# Altium PCB 核心板.PcbDoc (part 1 of 2)
Units mm, origin at the board's own origin, x right, y up, seen from the top; angles counter-clockwise.
Board outline 30 x 30 mm, 4 copper layers (Top Layer, Mid-Layer 1, Internal Plane 2, Bottom Layer); 39 components, 95 nets, 264 pads, 53 vias.
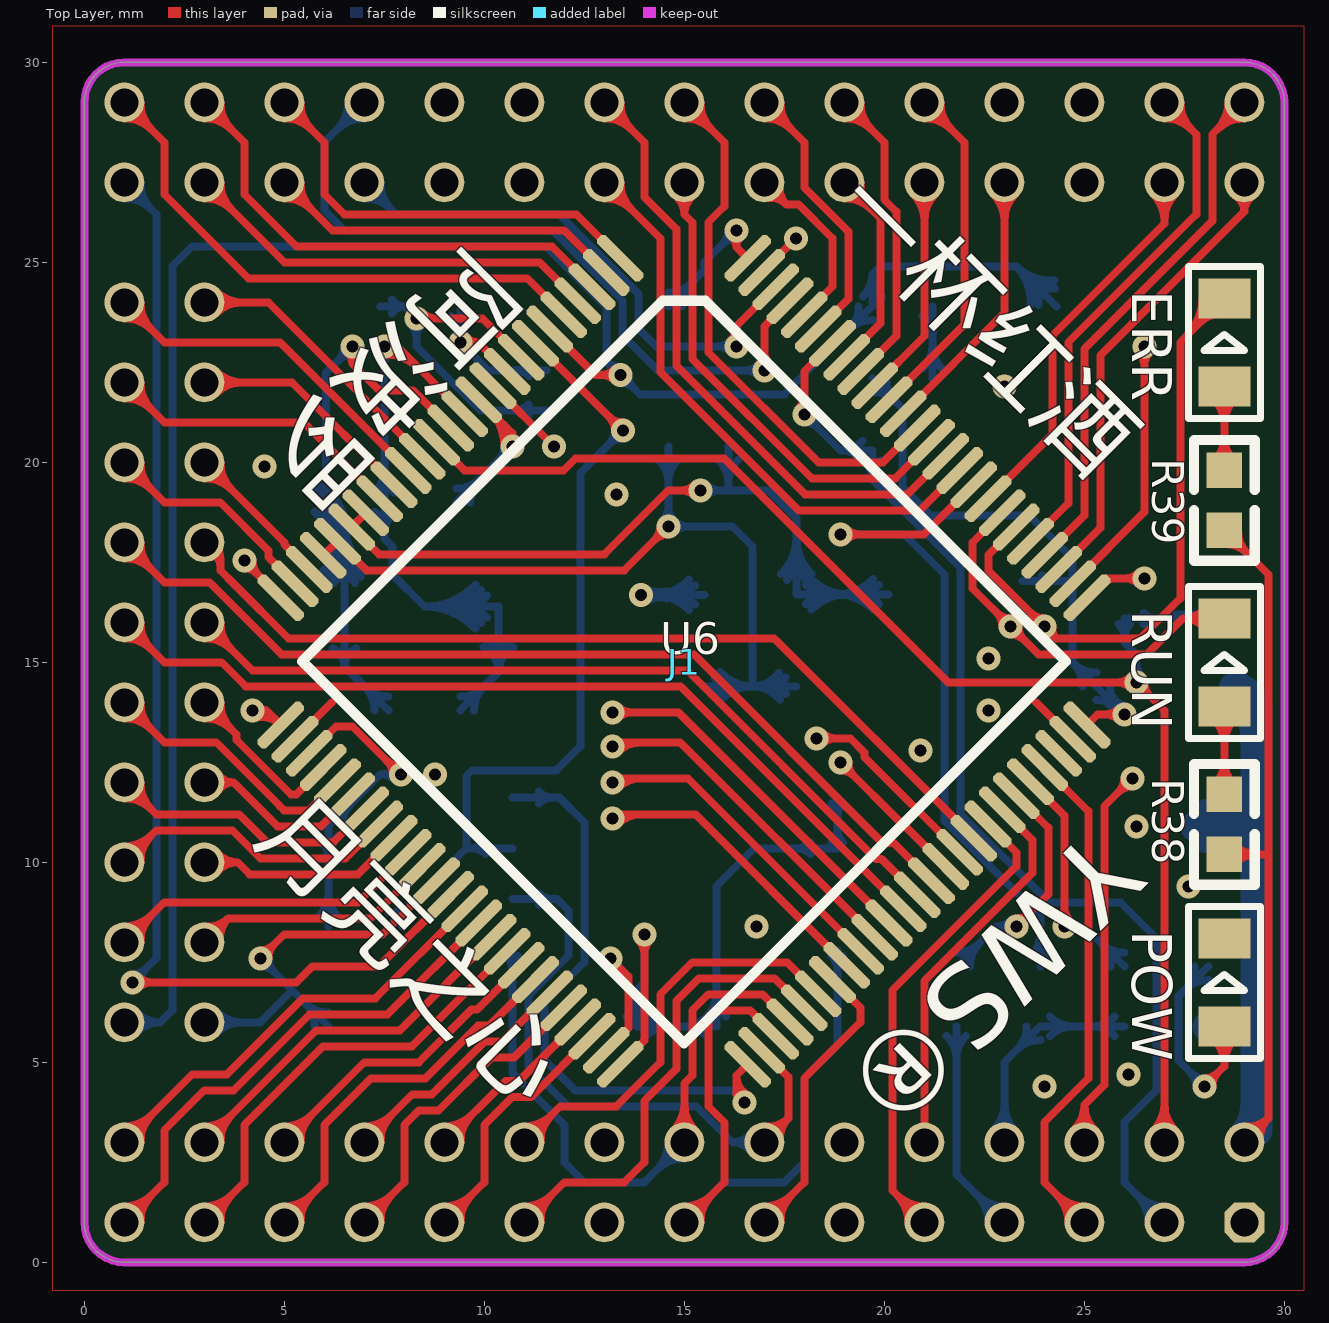
[diagram p0: Top Layer view]
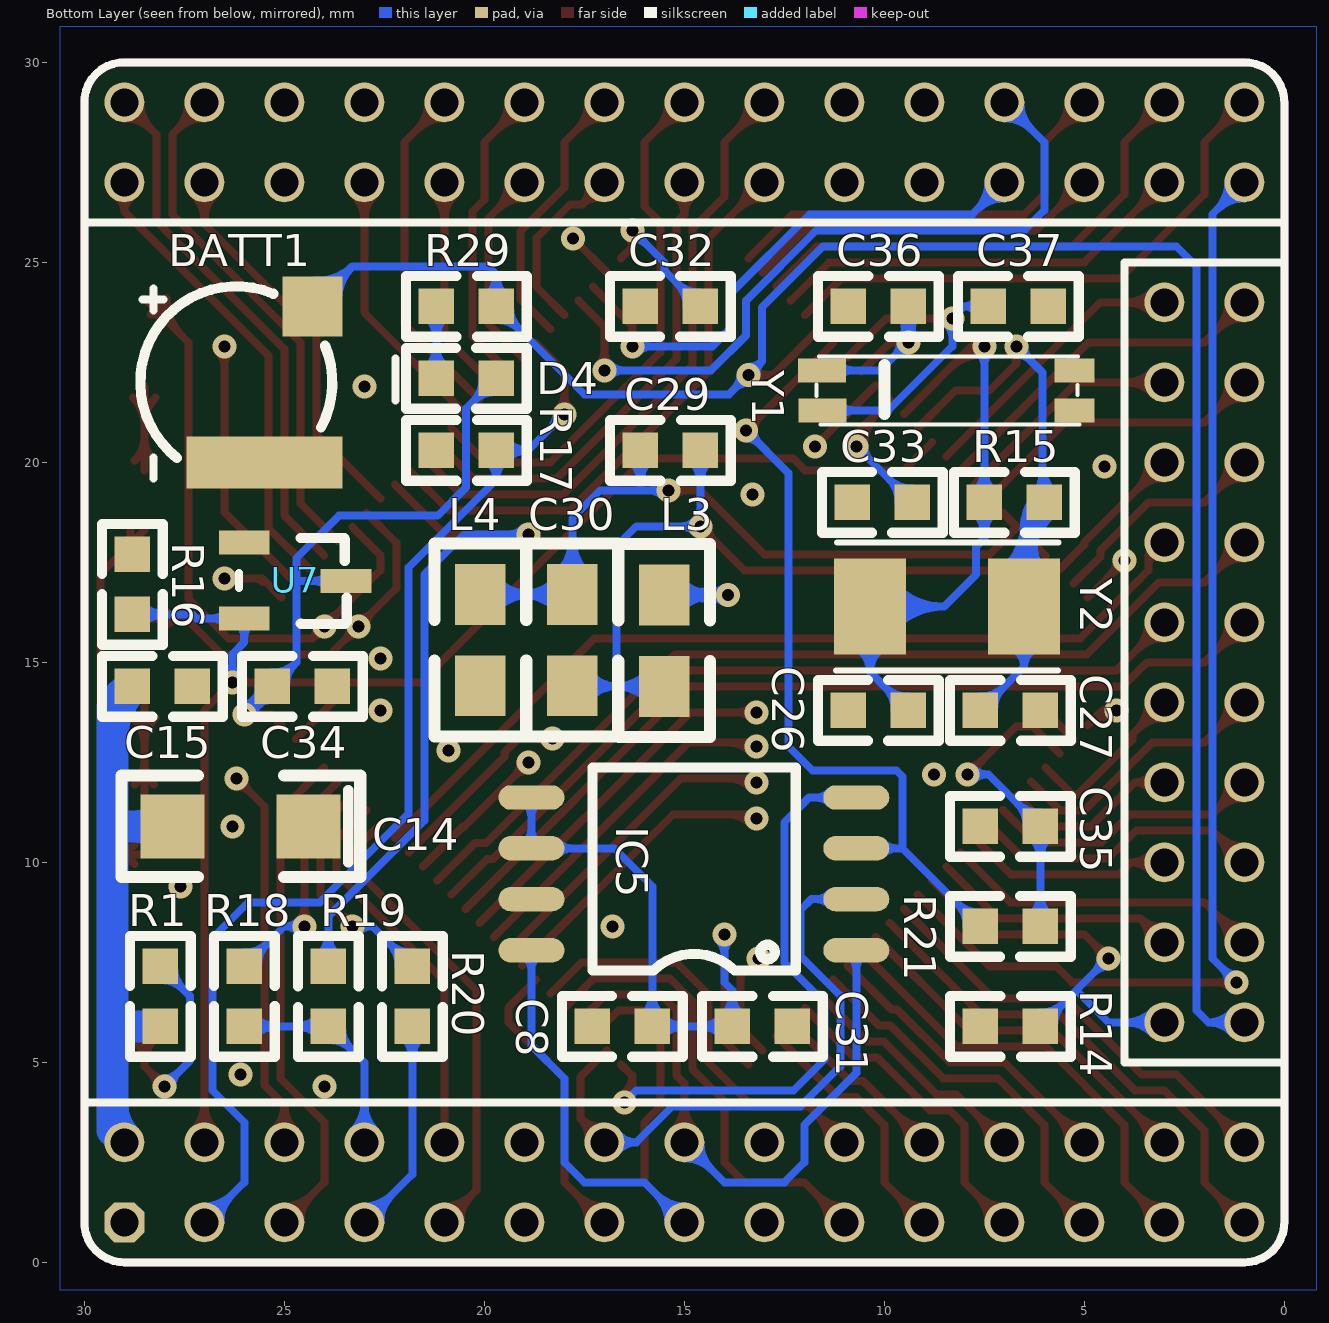
[diagram p1: Bottom Layer view, seen from below]
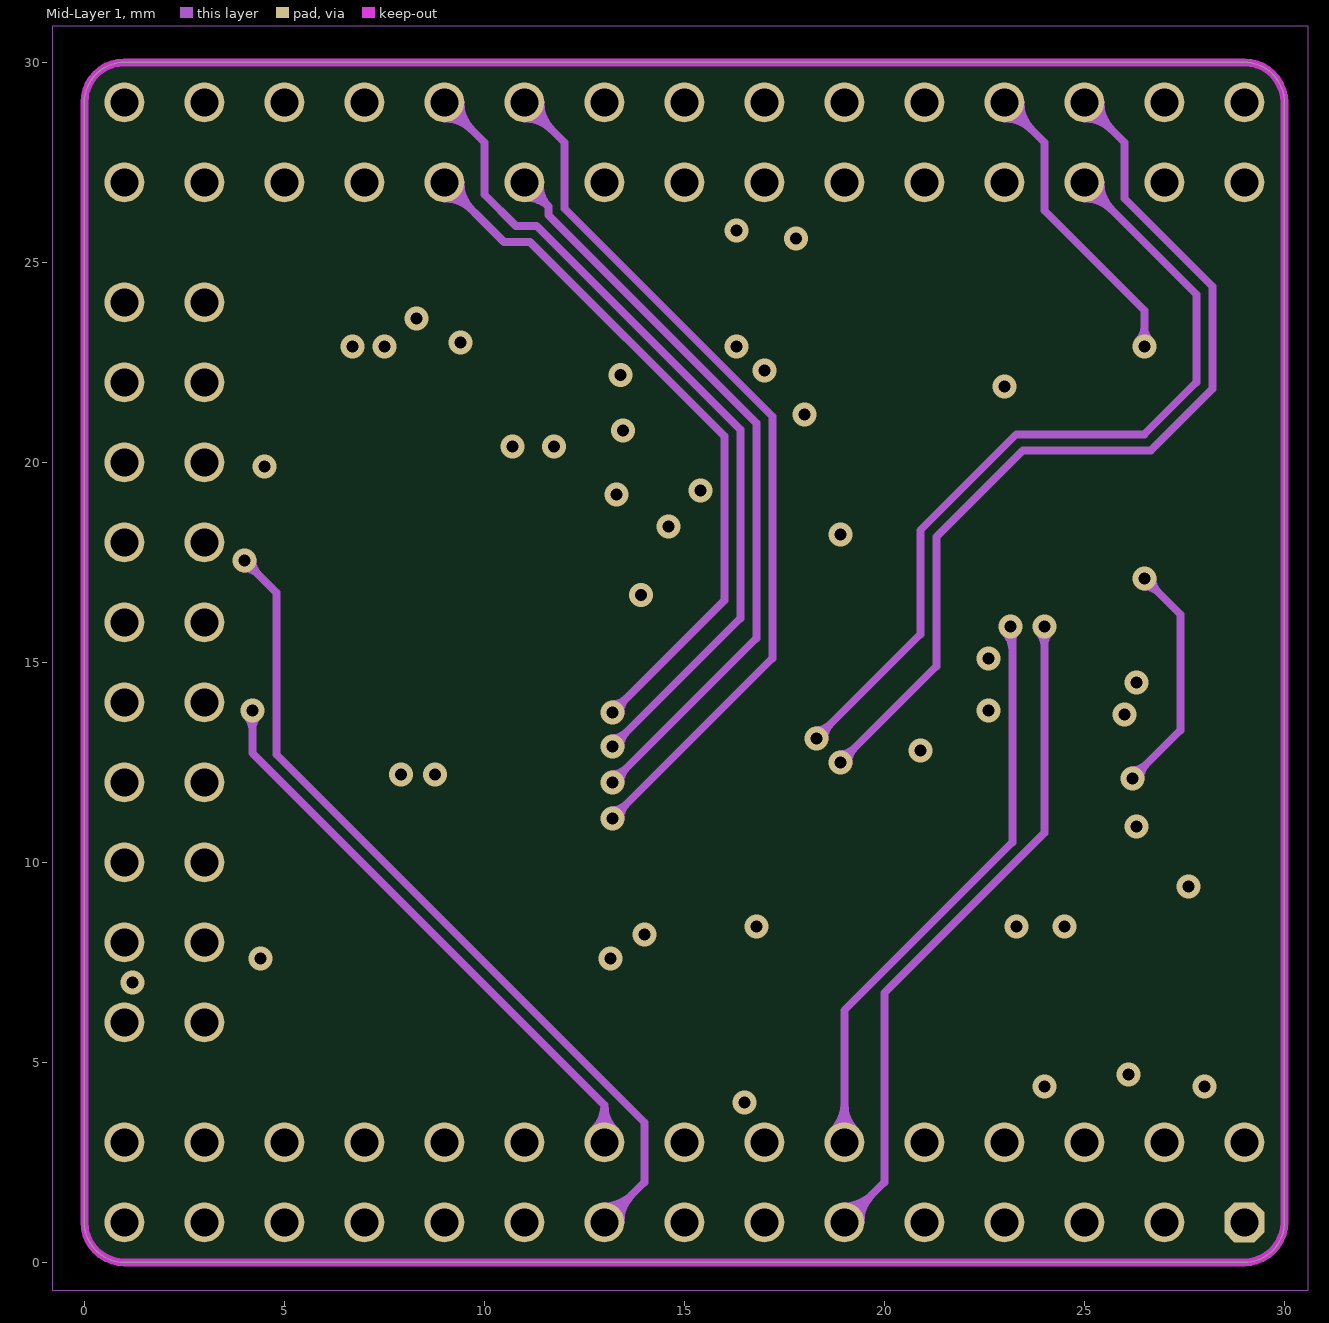
[diagram p2: Mid-Layer 1]
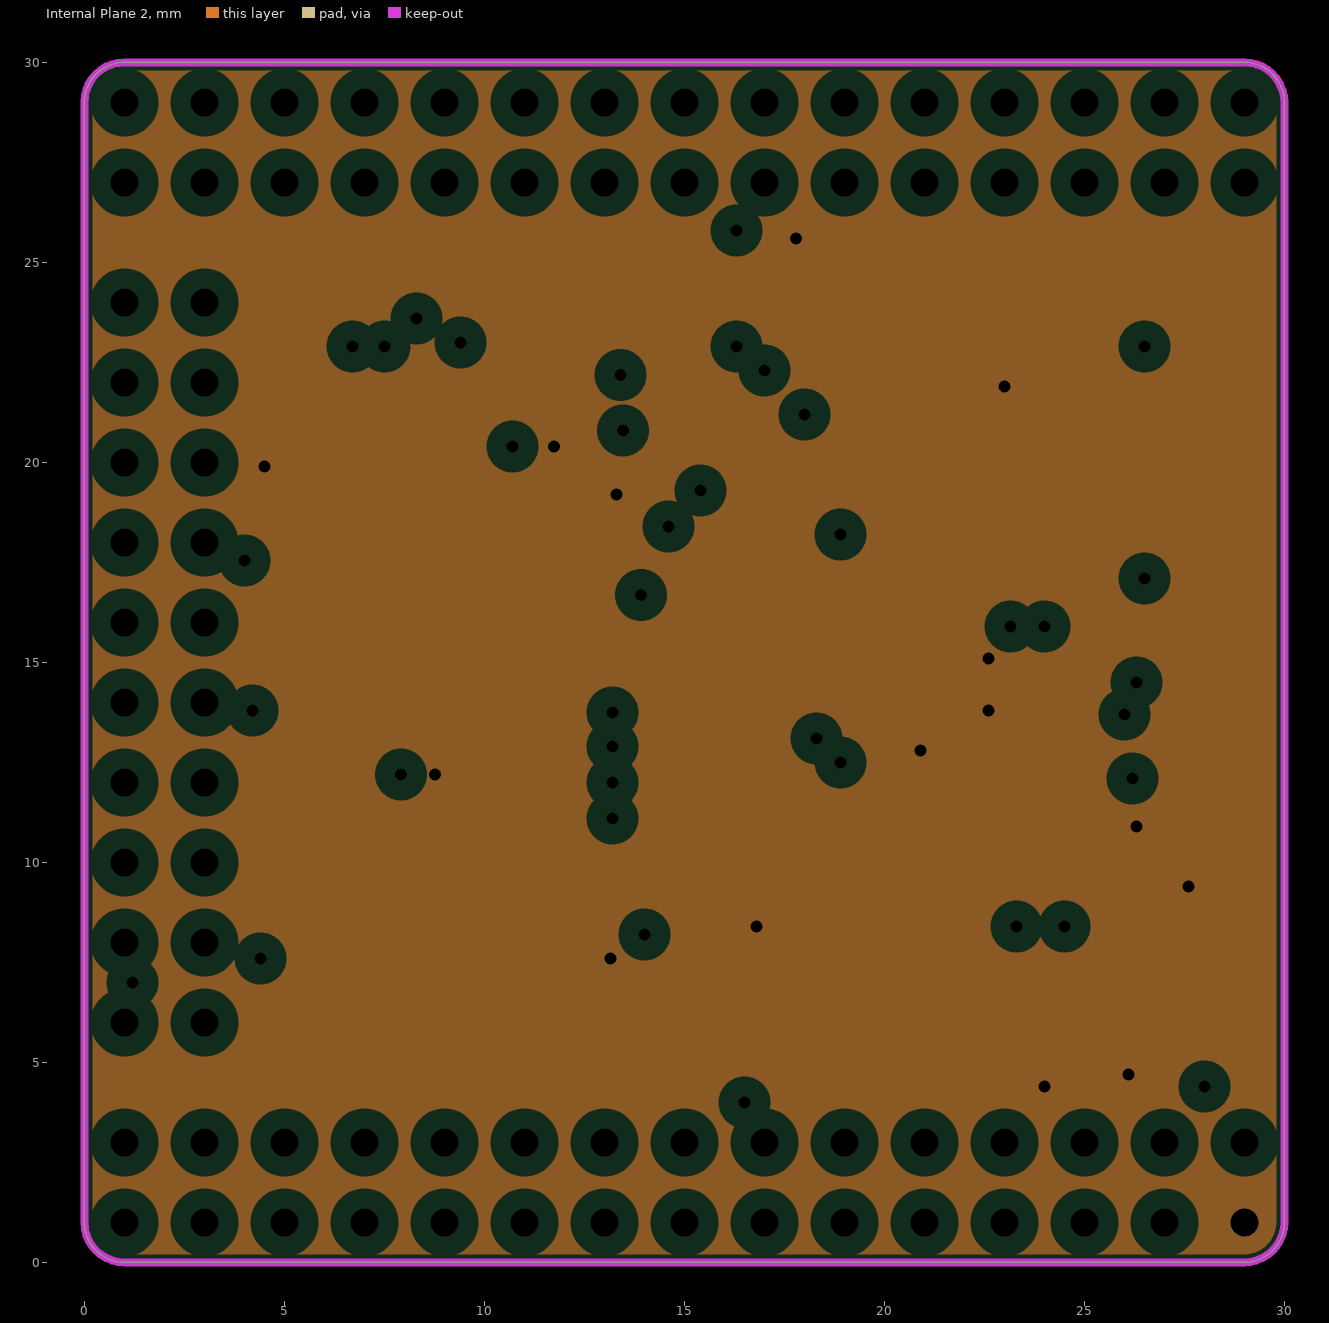
[diagram p3: Internal Plane 2, clearances drawn from the general rule]

## Layer stack, top to bottom
Top Layer: signal copper 0.0356
Dielectric: core 0.32, FR-4, Dk 4.8
Mid-Layer 1: signal copper 0.0356
Dielectric: prepreg 0.32, FR-4, Dk 4.8
Internal Plane 2: plane copper 0.0356, net GND
Dielectric: core 0.32, FR-4, Dk 4.8
Bottom Layer: signal copper 0.0356

## Board outline
0,1 ccw(c1,1) 1,0 29,0 ccw(c29,1) 30,1 30,29 ccw(c29,29) 29,30 1,30 ccw(c1,29) 0,29

## Design rules (kind name [scope] priority, off if disabled: settings)
AssemblyTestPointUsage [All] p0: scope1count=1 scope1_0_kind=Board scope1_0_value=Board scope2count=1 scope2_0_kind=Board scope2_0_value=Board commentlength=0
AssemblyTestpoint [All] p0: scope1count=1 scope1_0_kind=Board scope1_0_value=Board scope2count=1 scope2_0_kind=Board scope2_0_value=Board commentlength=0
Clearance 敷铜与焊盘的间距 [All] p0 off: scope1count=1 scope1_0_kind=Board scope1_0_value=Board scope2count=1 scope2_0_kind=Board scope2_0_value=Board commentlength=79 gap=0.3 // Protel DXP Scope 2 Expression Was: InPolygon   敷铜与焊盘的间距应不小于0.254mm，这里默认为0.3mm。
Clearance 整体布线间距 [All] p0: scope1count=1 scope1_0_kind=Board scope1_0_value=Board scope2count=1 scope2_0_kind=Board scope2_0_value=Board commentlength=21 gap=0.2 // 这个针对整体布线间距用，默认为0.2MM
Clearance 敷铜与焊盘的间距 [(InPadClass('All Pads')) vs InPolygon] p1: gap=0.3 // 敷铜与焊盘的间距应不小于0.254mm，这里默认为0.3mm。
Clearance 整体布线间距 [All] p2: gap=0.2 // 这个针对整体布线间距用，默认为0.2MM
ComponentClearance 器件间距 [All] p0 off: scope1count=1 scope1_0_kind=Board scope1_0_value=Board scope2count=1 scope2_0_kind=Board scope2_0_value=Board commentlength=0 gap=0.254 collisioncheckmode=3
ComponentClearance 器件间距 [All] p1 off: gap=0.254 collisioncheckmode=3 verticalgap=0.254 showdistances=FALSE
DiffPairsRouting [All] p0: scope1count=1 scope1_0_kind=Board scope1_0_value=Board scope2count=1 scope2_0_kind=Board scope2_0_value=Board commentlength=0
FabricationTestPointUsage [All] p0: scope1count=1 scope1_0_kind=Board scope1_0_value=Board scope2count=1 scope2_0_kind=Board scope2_0_value=Board commentlength=0 valid=0 allowmultiple=FALSE
FabricationTestpoint [All] p0: scope1count=1 scope1_0_kind=Board scope1_0_value=Board scope2count=1 scope2_0_kind=Board scope2_0_value=Board commentlength=0 side=3 testpointundercomponent=TRUE minsize=1.016 maxsize=2.54 preferedsize=1.524 minholesize=0 maxholesize=1.016 preferedholesize=0.813 testpointgrid=0.025
FanoutControl Fanout_BGA [All] p0 off: scope1count=1 scope1_0_kind=Board scope1_0_value=Board scope2count=1 scope2_0_kind=Board scope2_0_value=Board commentlength=69 // Protel DXP Scope 1 Expression Was: IsBGA   Fanout_BGA (Default Rule)
FanoutControl Fanout_LCC [All] p0 off: scope1count=1 scope1_0_kind=Board scope1_0_value=Board scope2count=1 scope2_0_kind=Board scope2_0_value=Board commentlength=69 // Protel DXP Scope 1 Expression Was: IsLCC   Fanout_LCC (Default Rule)
FanoutControl Fanout_SOIC [All] p0 off: scope1count=1 scope1_0_kind=Board scope1_0_value=Board scope2count=1 scope2_0_kind=Board scope2_0_value=Board commentlength=71 // Protel DXP Scope 1 Expression Was: IsSOIC   Fanout_SOIC (Default Rule)
FanoutControl Fanout_Small [All] p0 off: scope1count=1 scope1_0_kind=Board scope1_0_value=Board scope2count=1 scope2_0_kind=Board scope2_0_value=Board commentlength=84 // Protel DXP Scope 1 Expression Was: (CompPinCount < 5)   Fanout_Small (Default Rule)
FanoutControl Fanout_Default [All] p0: scope1count=1 scope1_0_kind=Board scope1_0_value=Board scope2count=1 scope2_0_kind=Board scope2_0_value=Board commentlength=30 // Fanout_Default (Default Rule)
Height [All] p0 off: scope1count=1 scope1_0_kind=Board scope1_0_value=Board scope2count=1 scope2_0_kind=Board scope2_0_value=Board commentlength=0
Height [All] p1 off: minheight=0 maxheight=25.4 prefheight=12.7
HoleSize [All] p0: scope1count=1 scope1_0_kind=Board scope1_0_value=Board scope2count=1 scope2_0_kind=Board scope2_0_value=Board commentlength=0 absolutevalues=TRUE maxlimit=2.54 minlimit=0.025 maxpercent=80.000 minpercent=20.000
HoleToHoleClearance [All] p0: scope1count=1 scope1_0_kind=Board scope1_0_value=Board scope2count=1 scope2_0_kind=Board scope2_0_value=Board commentlength=0
LayerPairs [All] p0: scope1count=1 scope1_0_kind=Board scope1_0_value=Board scope2count=1 scope2_0_kind=Board scope2_0_value=Board commentlength=0 enforce=TRUE
MinimumSolderMaskSliver [All] p0: scope1count=1 scope1_0_kind=Board scope1_0_value=Board scope2count=1 scope2_0_kind=Board scope2_0_value=Board commentlength=0
NetAntennae [All] p0: scope1count=1 scope1_0_kind=Board scope1_0_value=Board scope2count=1 scope2_0_kind=Board scope2_0_value=Board commentlength=0
PasteMaskExpansion [All] p0: scope1count=1 scope1_0_kind=Board scope1_0_value=Board scope2count=1 scope2_0_kind=Board scope2_0_value=Board commentlength=0 expansion=0
PlaneClearance [All] p0: scope1count=1 scope1_0_kind=Board scope1_0_value=Board scope2count=1 scope2_0_kind=Board scope2_0_value=Board commentlength=0 clearance=0.5
PlaneClearance [All] p1: clearance=0.5
PlaneConnect [All] p0: scope1count=1 scope1_0_kind=Board scope1_0_value=Board scope2count=1 scope2_0_kind=Board scope2_0_value=Board commentlength=0 planeconnectstyle=Relief reliefexpansion=0.15 reliefentries=4 reliefconductorwidth=0.2 reliefairgap=0.3
PlaneConnect [All] p1: planeconnectstyle=Relief reliefexpansion=0.15 reliefentries=4 reliefconductorwidth=0.2 reliefairgap=0.3
PolygonConnect 过孔敷铜连接 [All] p0 off: scope1count=1 scope1_0_kind=Board scope1_0_value=Board scope2count=1 scope2_0_kind=Board scope2_0_value=Board commentlength=54 connectstyle=Direct reliefconductorwidth=0.254 reliefentries=4 polygonreliefangle="90 Angle" // Protel DXP Scope 2 Expression Was: IsVia   过孔敷铜连接为直连型
PolygonConnect 整版敷铜连接 [All] p0: scope1count=1 scope1_0_kind=Board scope1_0_value=Board scope2count=1 scope2_0_kind=Board scope2_0_value=Board commentlength=31 connectstyle=Relief reliefconductorwidth=0.2 reliefentries=4 polygonreliefangle="90 Angle" // 整版敷铜连接为散热型。导线宽度0.2mm；间距：0.3mm。
PolygonConnect 过孔敷铜连接 [All vs IsVia] p1: connectstyle=Direct reliefconductorwidth=0.254 reliefentries=4 polygonreliefangle="90 Angle" airgapwidth=0.254 // 过孔敷铜连接为直连型
PolygonConnect 整版敷铜连接 [All] p2: connectstyle=Relief reliefconductorwidth=0.2 reliefentries=4 polygonreliefangle="90 Angle" airgapwidth=0.3 // 整版敷铜连接为散热型。导线宽度0.2mm；间距：0.3mm。
RoomDefinition 核心板 [All] p0: scope1count=1 scope1_0_kind=ComponentClass scope1_0_value=核心板 scope2count=1 scope2_0_kind=Board scope2_0_value=Board commentlength=0 region_x1=440275590 region_y1=427440090 region_x2=454803149 region_y2=439960629 confinementstyle=ConfineIn
RoomDefinition 核心板 [InComponentClass('核心板')] p1: confinementstyle=ConfineIn formatcopy=TRUE lockcomponents=FALSE outline -6.1,-0.902 30.8,-0.902 30.8,30.9 -6.1,30.9
RoutingCorners [All] p0: scope1count=1 scope1_0_kind=Board scope1_0_value=Board scope2count=1 scope2_0_kind=Board scope2_0_value=Board commentlength=0 cornerstyle=45-Degree minsetback=2.54 maxsetback=2.54
RoutingLayers [All] p0: scope1count=1 scope1_0_kind=Board scope1_0_value=Board scope2count=1 scope2_0_kind=Board scope2_0_value=Board commentlength=0 top layer=Automatic mid layer 1=Automatic bottom layer=Automatic
RoutingPriority [All] p0: scope1count=1 scope1_0_kind=Board scope1_0_value=Board scope2count=1 scope2_0_kind=Board scope2_0_value=Board commentlength=0
RoutingTopology [All] p0: scope1count=1 scope1_0_kind=Board scope1_0_value=Board scope2count=1 scope2_0_kind=Board scope2_0_value=Board commentlength=0 topology=Shortest
RoutingVias 过孔尺寸 [All] p0: scope1count=1 scope1_0_kind=Board scope1_0_value=Board scope2count=1 scope2_0_kind=Board scope2_0_value=Board commentlength=0 holewidth=0.3 width=0.6 viastyle="Through Hole" minholewidth=0.3 minwidth=0.6 maxholewidth=0.3 maxwidth=0.6
RoutingVias 过孔尺寸 [All] p1: holewidth=0.3 width=0.6 viastyle="Through Hole" minholewidth=0.3 minwidth=0.6 maxholewidth=0.3 maxwidth=0.6
ShortCircuit 短路允许 [All] p0: scope1count=1 scope1_0_kind=Board scope1_0_value=Board scope2count=1 scope2_0_kind=Board scope2_0_value=Board commentlength=10 allowed=FALSE // 默认为不允许短路。
ShortCircuit 短路允许 [All] p1: allowed=FALSE // 默认为不允许短路。
SilkToSilkClearance [All] p0: scope1count=1 scope1_0_kind=Board scope1_0_value=Board scope2count=1 scope2_0_kind=Board scope2_0_value=Board commentlength=0
SilkToSolderMaskClearance [All] p0 off: scope1count=1 scope1_0_kind=Board scope1_0_value=Board scope2count=1 scope2_0_kind=Board scope2_0_value=Board commentlength=44 // Protel DXP Scope 1 Expression Was: IsPad
SolderMaskExpansion [All] p0: scope1count=1 scope1_0_kind=Board scope1_0_value=Board scope2count=1 scope2_0_kind=Board scope2_0_value=Board commentlength=0 expansion=0.102
SolderMaskExpansion [All] p1: expansion=0.102
UnRoutedNet 开路约束 [All] p0: scope1count=1 scope1_0_kind=Board scope1_0_value=Board scope2count=1 scope2_0_kind=Board scope2_0_value=Board commentlength=0
UnRoutedNet 开路约束 [All] p1:
Width 整体线宽 [All] p0: scope1count=1 scope1_0_kind=Board scope1_0_value=Board scope2count=1 scope2_0_kind=Board scope2_0_value=Board commentlength=34 maxlimit=2 minlimit=0.2 preferedwidth=0.2 // 整体线宽默认为：最小：0.2mm；最大：2mm；默认：0.2mm。
Width 整体线宽 [All] p1: maxlimit=2 minlimit=0.2 preferedwidth=0.2 toplayer_maxwidth=0.2 midlayer1_maxwidth=0.2 minimp=50.000000 maximp=50.000000 favimp=50.000000 // 整体线宽默认为：最小：0.2mm；最大：2mm；默认：0.2mm。
22 further rules are at their usual default settings.

## Components (designator, comment, footprint, x,y, rotation, side; value= is the part's Value field where it differs from the comment)
BATT1 "XH414H" XH414H_IV01E 26.2,22 r270 bottom
C8 "104" 0603A 15.8,5.9 r0 bottom
C14 "470UF" 1206C 27.8,10.9 r180 bottom
C15 "104" 0603A 28.8,14.4 r180 bottom
C26 "15" 0603A 9.4,13.8 r0 bottom
C27 "15" 0603A 7.6,13.8 r180 bottom
C29 "104" 0603A 16.1,20.3 r180 bottom
C30 "1uF" 0805 17.8,16.7 r270 bottom
C31 "104" 0603A 13.8,5.9 r180 bottom
C32 "104" 0603A 14.6,23.9 r0 bottom
C33 "104" 0603A 9.3,19 r0 bottom
C34 "104" 0603A 25.3,14.4 r180 bottom
C35 "104" 0603A 6.1,10.9 r0 bottom
C36 "15" 0603A 10.9,23.9 r180 bottom
C37 "15" 0603A 5.9,23.9 r0 bottom
D4 "RB521S" 0603D 19.7,22.1 r0 bottom
ERR "" SMDLED 28.5,21.9 r90 top
IC5 "AT45DBX" SOIC-8 10.7,7.8 r0 bottom
J1 "物联网核心板" 核心板-物联网1 29,1 r0 top
L3 "100uH" 0805 15.5,14.4 r90 bottom
L4 "100uH" 0805 20.1,16.7 r270 bottom
POW "" SMDLED 28.5,5.9 r90 top
R1 "1K" 0603A 28.1,5.9 r90 bottom
R14 "10K" 0603A 7.6,5.9 r180 bottom
R15 "1M" 0603A 7.5,19 r180 bottom
R16 "10K" 0603A 28.8,16.2 r90 bottom
R17 "1K" 0603A 21.2,20.3 r180 bottom
R18 "10" 0603A 26,5.9 r90 bottom
R19 "1.5K" 0603A 23.9,7.4 r270 bottom
R20 "10" 0603A 21.8,7.4 r270 bottom
R21 "10K" 0603A 6.1,8.4 r0 bottom
R29 "1.5K" 0603A 21.2,23.9 r180 bottom
R38 "1K" 0603A 28.5,10.2 r90 top
R39 "1K" 0603A 28.5,18.3 r90 top
RUN "" SMDLED 28.5,13.9 r90 top
U6 "stm32f1xVxT" LQFP100 13.4,25.1 r315 top
U7 "MAX809" SOT23 26,18 r270 bottom
Y1 "32768" MC-146 8.4,21.8 r180 bottom
Y2 "8M" XTAL-5032 6.5,16.4 r0 bottom

## Footprints (in the part's own frame and the unit in brackets; to place one, negate y for a bottom-side part, rotate by r counter-clockwise, add the part's x,y. Pads: shape width x height; smd on the part's side, far side on the other; paste and mask are expansions set on the pad)
0603A [mm]
  rect 0.88x0.88 smd: 1(0,0) 2(1.5,0)
  silkscreen extent -0.76,-0.76 2.26,0.76
0603D [mm]
  rect 0.88x0.88 smd: A(0,0) K(1.5,0)
  silkscreen extent -0.76,-0.76 2.52,0.76
0805 [mil]
  rect 60x50 smd: 1(0,0) 2(90,0)
  silkscreen extent -50,-45 140,45
1206C [mm]
  rect 1.6x1.6 smd: 1(0,0) 2(3.4,0)
  silkscreen extent -1.27,-1.27 4.7,1.27
LQFP100 [mm]
  oct 1x1 on Top Overlay: 0(0.842,1.408)
  oct 1.5x0.3 smd: 1(0,0) 2(0,-0.5) 3(0,-1) 4(0,-1.5) 5(0,-2) 6(0,-2.5) 7(0,-3) 8(0,-3.5) 9(0,-4) 10(0,-4.5) 11(0,-5) 12(0,-5.5) 13(0,-6) 14(0,-6.5) 15(0,-7) 16(0,-7.5) 17(0,-8) 18(0,-8.5) 19(0,-9) 20(0,-9.5) 21(0,-10) 22(0,-10.5) 23(0,-11) 24(0,-11.5) 25(0,-12) 51(16.5,-12) 52(16.5,-11.5) 53(16.5,-11) 54(16.5,-10.5) 55(16.5,-10) 56(16.5,-9.5) 57(16.5,-9) 58(16.5,-8.5) 59(16.5,-8) 60(16.5,-7.5) 61(16.5,-7) 62(16.5,-6.5) 63(16.5,-6) 64(16.5,-5.5) 65(16.5,-5) 66(16.5,-4.5) 67(16.5,-4) 68(16.5,-3.5) 69(16.5,-3) 70(16.5,-2.5) 71(16.5,-2) 72(16.5,-1.5) 73(16.5,-1) 74(16.5,-0.5) 75(16.5,0)
  oct 0.3x1.5 smd: 26(2.25,-14.25) 27(2.75,-14.25) 28(3.25,-14.25) 29(3.75,-14.25) 30(4.25,-14.25) 31(4.75,-14.25) 32(5.25,-14.25) 33(5.75,-14.25) 34(6.25,-14.25) 35(6.75,-14.25) 36(7.25,-14.25) 37(7.75,-14.25) 38(8.25,-14.24) 39(8.75,-14.25) 40(9.25,-14.25) 41(9.75,-14.25) 42(10.25,-14.25) 43(10.75,-14.25) 44(11.25,-14.25) 45(11.75,-14.25) 46(12.25,-14.25) 47(12.75,-14.25) 48(13.25,-14.25) 49(13.75,-14.25) 50(14.25,-14.25) 76(14.25,2.25) 77(13.75,2.25) 78(13.25,2.25) 79(12.75,2.25) 80(12.25,2.25) 81(11.75,2.25) 82(11.25,2.25) 83(10.75,2.25) 84(10.25,2.25) 85(9.75,2.25) 86(9.25,2.25) 87(8.75,2.25) 88(8.25,2.25) 89(7.75,2.25) 90(7.25,2.25) 91(6.75,2.25) 92(6.25,2.25) 93(5.75,2.25) 94(5.25,2.25) 95(4.75,2.25) 96(4.25,2.25) 97(3.75,2.25) 98(3.25,2.25) 99(2.75,2.25) 100(2.25,2.25)
  silkscreen extent 1.5,-12.75 15,0.75
MC-146 [mm]
  rect 1.2x0.6 smd: 1(-3.153,0.501) 2(-3.143,-0.5)
  rect 1x0.6 smd: 3(3.153,-0.501) 3(3.153,0.49)
  silkscreen extent -3.29,-0.85 3.28,0.85
SMDLED [mm]
  rect 1x1.3 smd: A(0,0) K(2.2,0)
  silkscreen extent -0.8,-0.9 3,0.9
SOIC-8 [mil]
  oval 65x24 smd: 1(0,0) 2(0,-50.39) 3(0,-100.39) 4(0,-150.39) 5(319.82,-150.39) 6(319.82,-100.39) 7(319.82,-50.39) 8(319.82,0)
  silkscreen extent 60,-180 260,20
SOT23 [mm]
  rect 0.6x1.27 smd: 1(0,0) 2(1.905,0) 3(0.965,2.54)
  silkscreen extent -0.11,-0.13 2.04,2.56
XH414H_IV01E [mm]
  rect 1.5x1.5 smd: 1(-1.9,1.9)
  rect 1.3x3.9 smd: 2(2,0.7)
  silkscreen extent -2.4,-2.4 2.4,2.4
XTAL-5032 [mm]
  rect 1.8x2.4 smd: 1(0.004,0.009) 2(3.858,0.009)
  silkscreen extent -0.86,-1.6 4.71,1.6
核心板-物联网1 [mm]
  oct 1x1 hole 0.7: 1(0,0)
  round 1 hole 0.7: 2(0,2) 3(-2,0) 4(-2,2) 5(-4,0) 6(-4,2) 7(-6,0) 8(-6,2) 9(-8,0) 10(-8,2) 11(-10,0) 12(-10,2) 13(-12,0) 14(-12,2) 15(-14,0) 16(-14,2) 17(-16,0) 18(-16,2) 19(-18,0) 20(-18,2) 21(-20,0) 22(-20,2) 23(-22,0) 24(-22,2) 25(-24,0) 26(-24,2) 27(-26,0) 28(-26,2) 29(-28,0) 30(-28,2) 31(-26,5) 32(-28,5) 33(-26,7) 34(-28,7) 35(-26,9) 36(-28,9) 37(-26,11) 38(-28,11) 39(-26,13) 40(-28,13) 41(-26,15) 42(-28,15) 43(-26,17) 44(-28,17) 45(-26,19) 46(-28,19) 47(-26,21) 48(-28,21) 49(-26,23) 50(-28,23) 51(-28,26) 52(-28,28) 53(-26,26) 54(-26,28) 55(-24,26) 56(-24,28) 57(-22,26) 58(-22,28) 59(-20,26) 60(-20,28) 61(-18,26) 62(-18,28) 63(-16,26) 64(-16,28) 65(-14,26) 66(-14,28) 67(-12,26) 68(-12,28) 69(-10,26) 70(-10,28) 71(-8,26) 72(-8,28) 73(-6,26) 74(-6,28) 75(-4,26) 76(-4,28) 77(-2,26) 78(-2,28) 79(0,26) 80(0,28)

## Part data
BATT1: library part Battery
C8 C15 C31 C32 C33 C34 C35: library part CAP, "Capacitor"
C14: library part "CAPACITOR POL", "Capacitor"
C26 C27 C29 C30 C36 C37: library part C
D4: library part 二极管
ERR POW RUN: library part LED
L3 L4 R18 R19 R20 R21 R29: library part R
R1 R14 R15 R16 R17 R38 R39: library part RES2
U7: library part MAX809/810
Y1: library part XTAL_32, "Crystal Oscillator"
Y2: library part XTAL, "Crystal Oscillator"

## Via types
v1: diameter 0.6, hole 0.3, Top Layer to Bottom Layer, tented both sides, 53 vias

## Nets (pads, with @x,y where several pads share a name; then routed paths per layer and width w, separated by ;. In a path a pad name is that pad's centre, name@x,y a point inside that pad or via, vN(x,y) a via of type N, cw(c..) or ccw(c..) an arc to the next point about the centre after c; other vN are vias at no path point)
+3.3V: C8.1 C14.1 C15.1 C31.1 C32.1 C33.1 C34.1 C35.1 D4.A IC5.5 IC5.6 J1.2 L3.2 R1.1 R21.1 R38.1 R39.1 U6.11 U6.28 U6.50 U6.75 U6.100 U7.3 | length 121.7
  Top Layer w0.2: U6.28@5.622,12.726 6.296,13.4 6.7,13.4 7.9,12.2 v1(7.915,12.2) ; 7.548,12.552 ccw(c7.915,12.92) v1@7.915,12.4 ; 7.585,12.515 cw(c7.269,12.2) v1@7.715,12.2 ; U6.11@9.864,21.564 10.7,20.729 ; U6.11@10.126,21.303 cw(c9.223,20.4) v1@10.5,20.4 ; 10.467,20.962 cw(c9.906,20.4) v1(10.7,20.4) 10.7,20.729 ; v1@10.608,20.578 ccw(c10.529,20.729) 10.7,20.729 ; v1@10.792,20.578 cw(c10.871,20.729) 10.7,20.729 ; U6.50@13.4,4.947 14,5.547 v1(14,8.2) ; v1@13.859,8.059 cw(c13.517,7.717) 14,7.717 cw(c14.483,7.717) v1@14.141,8.059 ; v1@16.175,25.644 cw(c15.963,25.382) 16.3,25.382 ; v1(16.3,25.8) 16.3,25.382 ; v1@16.425,25.644 ccw(c16.637,25.382) 16.3,25.382 ; U6.100@16.582,25.1 16.3,25.382 ; U6.75@25.067,13.433 25.335,13.7 v1(26,13.7) ; v1@25.859,13.559 ccw(c25.517,13.217) 25.517,13.7 ccw(c25.517,14.183) v1@25.859,13.841 ; R38.1@28.5,10.2 29.6,10.2 ; R39.1@28.5,17.96 cw(c28.5,17.139) 29.08,17.72 cw(c29.661,18.3) R39.1@28.84,18.3 ; R39.1@28.5,18.3 29.6,17.2 29.6,10.2 ; R38.1@28.74,9.96 cw(c29.321,9.379) 29.321,10.2 cw(c29.321,11.021) R38.1@28.74,10.44 ; J1.2@29,3 29.6,3.6 ; J1.2@29.038,3.398 ccw(c29.105,4.095) 29.6,3.6 ; J1.2@29.398,3.038 cw(c30.095,3.105) 29.6,3.6 ; 29.6,3.6 29.6,10.2
  Bottom Layer w0.2: R21.1@5.86,8.64 ccw(c5.279,9.221) 6.1,9.221 ccw(c6.921,9.221) R21.1@6.34,8.64 ; C35.1@5.86,10.66 cw(c5.279,10.079) 6.1,10.079 cw(c6.921,10.079) C35.1@6.34,10.66 ; R21.1@6.1,8.4 C35.1@6.1,10.9 7.4,12.2 v1(7.915,12.2) ; C35.1@6.1,11.24 ccw(c6.1,12.061) 6.68,11.48 ; C35.1@6.44,10.9 cw(c7.261,10.9) 6.68,11.48 ; v1@7.774,12.059 ccw(c7.432,11.717) 7.432,12.2 ccw(c7.432,12.683) v1@7.774,12.341 ; C33.1@9.3,19 v1(10.7,20.4) ; C33.1@9.3,19.34 ccw(c9.3,20.161) 9.88,19.58 ccw(c10.461,19) C33.1@9.64,19 ; v1@10.5,20.4 cw(c10.017,20.4) 10.359,20.059 cw(c10.7,19.717) v1@10.7,20.2 ; C31.1@13.56,6.14 ccw(c12.979,6.721) 13.8,6.721 ccw(c14.621,6.721) 14.04,6.14 ccw(c14.621,6.721) 14.621,5.9 ccw(c14.621,5.079) C31.1@14.04,5.66 ; v1@13.859,8.059 cw(c13.517,7.717) 14,7.717 cw(c14.483,7.717) v1@14.141,8.059 ; v1(13.914,16.686) L3.2@15.5,16.686 ; v1(14,8.2) 14,7 13.8,6.8 C31.1@13.8,5.9 C8.1@15.8,5.9 15.8,9.4 16.75,10.35 IC5.6@18.823,10.35 IC5.5@18.823,11.62 ; v1@14.018,16.515 cw(c14.393,15.902) 14.562,16.601 ; v1@14.018,16.857 ccw(c14.393,17.47) 14.562,16.771 ; v1@14.055,16.545 cw(c14.397,16.203) 14.397,16.686 cw(c14.397,17.169) v1@14.055,16.827 ; v1@14.085,16.582 cw(c14.296,16.453) 14.238,16.693 ; v1@14.085,16.79 ccw(c14.296,16.919) 14.238,16.679 ; C32.1@14.6,23.9 15.5,24.8 15.5,25 v1(16.3,25.8) ; C32.1@14.6,24.24 ccw(c14.6,25.061) 15.18,24.48 ccw(c15.761,23.9) C32.1@14.94,23.9 ; L3.2@15.122,16.308 ccw(c14.208,15.394) 14.208,16.686 ccw(c14.208,17.978) L3.2@15.122,17.064 ; L3.2@15.263,16.449 ccw(c14.691,15.877) 14.691,16.686 ccw(c14.691,17.495) L3.2@15.263,16.923 ; C8.1@15.56,5.66 ccw(c14.979,5.079) 14.979,5.9 ccw(c14.979,6.721) 15.56,6.14 ccw(c14.979,6.721) 15.8,6.721 ccw(c16.621,6.721) C8.1@16.04,6.14 ; v1@16.1,25.8 cw(c15.617,25.8) 15.959,25.459 cw(c16.3,25.117) v1@16.3,25.6 ; IC5.6@18.158,10.205 ccw(c17.808,9.856) 17.808,10.35 ccw(c17.808,10.844) IC5.6@18.158,10.495 ; IC5.6@18.679,10.495 ccw(c18.329,10.844) 18.823,10.844 ccw(c19.318,10.844) IC5.6@18.968,10.495 ; IC5.5@18.679,11.475 cw(c18.329,11.126) 18.823,11.126 cw(c19.318,11.126) IC5.5@18.968,11.475 ; D4.A@19.7,21.76 cw(c19.7,20.939) 20.28,21.52 cw(c20.861,22.1) D4.A@20.04,22.1 ; D4.A@19.7,22.1 20.46,21.34 20.46,19.371 21.166,18.666 23.634,18.666 24.7,17.6 24.7,17.035 ; U7.3@23.46,17.035 24.7,17.035 ; U7.3@23.936,16.893 cw(c24.278,16.552) 24.278,17.035 cw(c24.278,17.518) U7.3@23.936,17.176 ; C34.1@24.96,14.4 ccw(c24.139,14.4) 24.72,14.98 ccw(c25.3,15.561) C34.1@25.3,14.74 ; C34.1@25.3,14.06 cw(c25.3,13.239) 25.88,13.82 cw(c26.461,14.4) C34.1@25.64,14.4 ; C34.1@25.512,14.032 cw(c25.196,13.485) v1@25.807,13.648 ; C34.1@25.668,14.188 ccw(c26.215,14.504) v1@26.052,13.893 ; 25.695,13.926 ccw(c25.862,14.215) v1@25.948,13.893 ; 25.774,14.005 cw(c25.485,13.838) v1@25.807,13.752 ; v1@25.8,13.7 ccw(c25.317,13.7) 25.659,14.041 ccw(c26,14.383) v1@26,13.9 ; v1(26,13.7) C34.1@25.3,14.4 24.7,15 24.7,17.035
  Bottom Layer w0.8: C14.1@27.8,10.9 29.3,10.9 ; C14.1@28.083,10.617 cw(c28.766,9.934) 28.766,10.9 cw(c28.766,11.866) C14.1@28.083,11.183 ; R1.1@28.1,5.9 29.3,5.9 ; C15.1@28.772,14.372 cw(c27.496,13.096) 29.3,13.096 ; C15.1@28.789,14.361 cw(c28.607,13.693) 29.3,13.693 ; C15.1@28.8,14.4 29.3,13.9 29.3,10.9 ; J1.2@28.929,3.071 ccw(c28.034,3.966) 29.3,3.966 ; J1.2@29,3 29.3,3.3 29.3,5.9 ; 29.3,5.9 29.3,10.9
BOOT0: J1.3 R17.2 U6.94 | length 33.5
  Top Layer w0.2: v1@17.859,21.341 ccw(c17.517,21.683) 18,21.683 ccw(c18.483,21.683) v1@18.141,21.341 ; v1(18,21.2) 18,22.275 U6.94@18.703,22.979
  Bottom Layer w0.2: v1@18,21 cw(c18,20.517) 18.341,20.859 cw(c18.683,21.2) v1@18.2,21.2 ; v1(18,21.2) 18.9,20.3 ; R17.2@19.455,20.064 ccw(c18.9,19.529) 18.9,20.3 ; R17.2@19.455,20.536 cw(c18.9,21.071) 18.9,20.3 ; R17.2@19.48,20.041 cw(c19.077,19.566) 19.7,19.566 ; R17.2@19.92,20.041 ccw(c20.323,19.566) 19.7,19.566 ; J1.3@26.6,1 ccw(c25.634,1) 26.317,1.683 ccw(c27,2.366) J1.3@27,1.4 ; J1.3@27,1 26,2 26,3.5 26.8,4.3 26.8,8.1 25.9,9 24.114,9 21.9,11.214 21.9,17.366 19.7,19.566 ; 18.9,20.3 R17.2@19.7,20.3 19.7,19.566
GND: BATT1.2 C8.2 C14.2 C15.2 C26.2 C27.2 C31.2 C32.2 C33.2 C34.2 C35.2 C36.1 C37.1 IC5.7 J1.1 L4.2 POW.K R14.1 R16.2 R17.1 U6.10 U6.27 U6.49 U6.74 U6.99 U7.1 Y1.3 | length 8.7
  Top Layer w0.2: U6.27@5.268,13.079 6.189,14 ; U6.10@10.218,21.918 v1(11.736,20.4) ; U6.49@13.046,5.301 13.6,5.855 13.6,7.151 v1(13.151,7.6) ; U6.99@16.936,24.746 v1(17.789,25.6) ; 23.793,14 U6.74@24.714,13.079
  other v1: 24,4.4 26.1,4.7 16.8,8.4 27.6,9.4 26.3,10.9 8.764,12.2 20.9,12.8 22.6,13.8 22.6,15.1 13.3,19.2 4.5,19.9 23,21.9
LED_ERR: ERR.K J1.11 U6.81 | length 38
  Top Layer w0.2: U6.81@23.299,18.382 22.6,17.683 22.6,17.3 v1(24,15.9) 24.3,15.6 ; v1@23.8,15.9 ccw(c23.317,15.9) 23.659,16.241 ccw(c24,16.583) v1@24,16.1 ; v1@24.019,15.701 cw(c24.053,15.353) 24.3,15.6 ; v1@24.199,15.881 ccw(c24.547,15.847) 24.3,15.6 ; 27.561,23.161 ccw(c26.622,24.1) ERR.K@27.95,24.1 ; 27.903,23.503 ccw(c27.305,24.1) ERR.K@28.15,24.1 ; 27.923,23.523 cw(c28.35,23.096) ERR.K@28.35,23.7 ; ERR.K@28.5,24.1 27.4,23 27.4,16.6 26.4,15.6 24.3,15.6
  Mid-Layer 1 w0.2: J1.11@19,1 20,2 20,6.734 24,10.734 v1(24,15.9) ; J1.11@19,1.4 ccw(c19,2.366) 19.683,1.683 ccw(c20.366,1) J1.11@19.4,1 ; v1@23.859,15.759 cw(c23.517,15.417) 24,15.417 cw(c24.483,15.417) v1@24.141,15.759
LED_RUN: J1.12 RUN.K U6.82 | length 29.3
  Top Layer w0.2: U6.82@22.946,18.736 22.2,17.99 22.2,16.851 v1(23.151,15.9) 23.851,15.2 26.566,15.2 27.466,16.1 ; v1@22.951,15.9 ccw(c22.469,15.9) 22.81,16.241 ccw(c23.151,16.583) v1@23.151,16.1 ; v1@23.151,15.7 cw(c23.151,15.217) 23.493,15.559 cw(c23.834,15.9) v1@23.351,15.9 ; RUN.K@28.05,15.836 ccw(c27.466,15.323) 27.466,16.1 ; RUN.K@28.05,16.364 cw(c27.466,16.877) 27.466,16.1 ; RUN.K@28.5,16.1 27.466,16.1
  Mid-Layer 1 w0.2: J1.12@18.717,3.283 ccw(c18.034,3.966) 19,3.966 ccw(c19.966,3.966) J1.12@19.283,3.283 ; J1.12@19,3 19,6.3 23.2,10.5 23.2,15.851 v1(23.151,15.9) ; v1@23.01,15.759 cw(c22.551,15.3) 23.2,15.3 ; 23.2,15.534 cw(c23.517,15.534) v1@23.293,15.759
NetD4_K: D4.K R29.1 | length 4.4
  Bottom Layer w0.2: D4.K@20.96,22.34 ccw(c20.379,22.921) 21.2,22.921 ccw(c22.021,22.921) D4.K@21.44,22.34 ; R29.1@20.96,23.66 cw(c20.379,23.079) 21.2,23.079 cw(c22.021,23.079) R29.1@21.44,23.66 ; D4.K@21.2,22.1 R29.1@21.2,23.9
NetERR_A: ERR.A R39.2 | length 4.9
  Top Layer w0.2: ERR.A@28.217,21.617 cw(c27.534,20.934) 28.5,20.934 cw(c29.466,20.934) ERR.A@28.783,21.617 ; R39.2@28.26,20.04 ccw(c27.679,20.621) 28.5,20.621 ccw(c29.321,20.621) R39.2@28.74,20.04 ; R39.2@28.5,19.8 ERR.A@28.5,21.9
NetPOW_A: POW.A R1.2 | length 9.6
  Top Layer w0.2: v1(28,4.4) 28.5,4.9 POW.A@28.5,5.9 ; v1@28,4.6 ccw(c28,5.083) 28.341,4.741 ccw(c28.683,4.4) v1@28.2,4.4 ; POW.A@28.217,5.617 cw(c27.534,4.934) 28.5,4.934 cw(c29.466,4.934) POW.A@28.783,5.617
  Bottom Layer w0.2: R1.2@27.76,7.4 cw(c26.939,7.4) 27.52,6.82 cw(c28.1,6.239) R1.2@28.1,7.06 ; v1@27.8,4.4 ccw(c27.317,4.4) 27.659,4.741 ccw(c28,5.083) v1@28,4.6 ; v1(28,4.4) 27.36,5.04 27.36,6.66 R1.2@28.1,7.4
NetR38_2: R38.2 RUN.A | length 5
  Top Layer w0.2: RUN.A@28.217,13.617 cw(c27.534,12.934) 28.5,12.934 cw(c29.466,12.934) RUN.A@28.783,13.617 ; R38.2@28.26,11.94 ccw(c27.679,12.521) 28.5,12.521 ccw(c29.321,12.521) R38.2@28.74,11.94 ; R38.2@28.5,11.7 RUN.A@28.5,13.9
NRST: J1.4 R16.1 U6.14 U7.2 | length 43.2
  Top Layer w0.2: U6.14@8.804,20.504 9.508,19.8 11.985,19.8 12.285,20.1 15.989,20.1 21.589,14.5 v1(26.3,14.5) 27,13.8 J1.4@27,3 ; v1@26.159,14.359 ccw(c25.817,14.017) 25.817,14.5 ccw(c25.817,14.983) v1@26.159,14.641 ; v1@26.3,14.3 cw(c26.3,13.817) 26.641,14.159 cw(c26.983,14.5) v1@26.5,14.5 ; J1.4@26.717,3.283 ccw(c26.034,3.966) 27,3.966 ccw(c27.966,3.966) J1.4@27.283,3.283
  Bottom Layer w0.2: U7.2@25.859,15.954 cw(c25.505,15.6) 26.005,15.6 ; 26.005,15.624 cw(c26.471,15.624) U7.2@26.141,15.954 ; v1@26.159,14.641 ccw(c25.817,14.983) 26.3,14.983 ccw(c26.783,14.983) v1@26.441,14.641 ; v1(26.3,14.5) 26.3,15.2 26.005,15.495 26.005,16.1 27.2,16.1 27.3,16.2 R16.1@28.8,16.2 ; U7.2@26.476,15.954 cw(c26.83,15.6) 26.83,16.1 ; U7.2@26.476,16.236 ccw(c26.806,16.566) 26.806,16.1 ; R16.1@28.56,15.96 ccw(c27.979,15.379) 27.979,16.2 ccw(c27.979,17.021) R16.1@28.56,16.44
OSC_IN: C26.1 R15.1 U6.12 Y2.2 | length 30.1
  Top Layer w0.2: v1@7.5,22.7 cw(c7.5,21.44) 8.391,22.331 ; v1@7.679,22.811 cw(c7.822,22.741) 7.822,22.9 ; v1@7.679,22.989 ccw(c7.822,23.059) 7.822,22.9 ; 8.049,22.672 ccw(c7.5,22.123) v1(7.5,22.9) 7.822,22.9 ; U6.12@9.511,21.211 7.822,22.9
  Bottom Layer w0.2: R15.1@7.26,18.76 cw(c6.679,18.179) 7.5,18.179 cw(c8.321,18.179) R15.1@7.74,18.76 ; R15.1@7.26,19.24 ccw(c6.679,19.821) 7.5,19.821 ccw(c8.321,19.821) R15.1@7.74,19.24 ; v1@7.359,22.759 cw(c7.017,22.417) 7.5,22.417 cw(c7.983,22.417) v1@7.641,22.759 ; v1(7.5,22.9) R15.1@7.5,19 7.5,18.095 7.704,17.891 7.704,17.196 8.509,16.391 ; C26.1@9.4,13.8 10.358,14.758 ; C26.1@9.4,14.14 ccw(c9.4,14.961) 9.98,14.38 ccw(c10.561,13.8) C26.1@9.74,13.8 ; Y2.2@9.775,15.843 ccw(c8.509,14.655) 8.509,16.391 ; Y2.2@9.775,16.939 cw(c8.509,18.127) 8.509,16.391 ; Y2.2@9.92,15.98 ccw(c8.971,15.089) 8.971,16.391 ccw(c8.971,17.693) Y2.2@9.92,16.802 ; Y2.2@9.981,15.385 cw(c9.647,14.758) 10.358,14.758 ; Y2.2@10.066,16.117 ccw(c9.433,15.523) 9.433,16.391 ccw(c9.433,17.259) Y2.2@10.066,16.665 ; Y2.2@10.076,15.562 cw(c9.825,15.091) 10.358,15.091 cw(c10.891,15.091) Y2.2@10.64,15.562 ; Y2.2@10.734,15.385 ccw(c11.069,14.758) 10.358,14.758 ; 8.509,16.391 Y2.2@10.358,16.391 10.358,14.758
OSC_OUT: C27.1 R15.2 U6.13 Y2.1 | length 35.9
  Top Layer w0.2: v1@6.57,22.748 cw(c6.33,22.466) 6.7,22.466 ; v1(6.7,22.9) 6.7,22.466 ; v1@6.83,22.748 ccw(c7.07,22.466) 6.7,22.466 ; U6.13@9.157,20.857 8.215,21.8 7.366,21.8 6.7,22.466
  Bottom Layer w0.2: R15.2@5.76,18.76 cw(c3.962,16.962) Y2.1@6.504,16.962 ; R15.2@5.76,19.24 ccw(c5.066,19.934) 6.047,19.934 ; R15.2@5.901,18.901 cw(c4.445,17.445) Y2.1@6.504,17.445 ; R15.2@5.901,19.099 ccw(c5.549,19.451) 6.047,19.451 ; Y2.1@5.967,17.284 ccw(c4.868,18.496) 6.504,18.496 ; Y2.1@5.994,17.308 ccw(c5.534,17.864) 6.235,18.039 ccw(c7.061,18.246) Y2.1@6.774,17.444 ; R15.2@6.036,18.662 cw(c6.096,18.088) 6.504,18.496 ; R15.2@6.042,19.042 cw(c4.928,17.928) 6.504,17.928 ; 6.047,19.708 ccw(c6.708,19.708) R15.2@6.24,19.24 ; Y2.1@6.101,17.136 ccw(c5.277,18.045) 6.504,18.045 ccw(c7.731,18.045) Y2.1@6.907,17.136 ; Y2.1@6.122,17.153 ccw(c5.758,17.593) 6.312,17.732 ; R15.2@6.184,19.184 cw(c5.411,18.411) 6.504,18.411 ; Y2.1@6.199,15.351 cw(c6.012,14.896) 6.504,14.896 ; Y2.1@6.216,17.437 ccw(c6.09,17.763) 6.434,17.826 ccw(c6.919,17.916) Y2.1@6.761,17.449 ; Y2.1@6.235,16.987 ccw(c5.686,17.593) 6.504,17.593 ccw(c7.322,17.593) Y2.1@6.773,16.987 ; 6.325,17.676 ccw(c6.909,17.822) Y2.1@6.706,17.256 ; R15.2@6.338,18.964 ccw(c6.912,18.904) 6.504,18.496 ; v1@6.5,22.9 cw(c6.017,22.9) 6.359,22.559 cw(c6.7,22.217) v1@6.7,22.7 ; v1(6.7,22.9) 6.047,22.247 6.047,19.047 R15.2@6,19 6.504,18.496 ; Y2.1@6.809,15.351 ccw(c6.996,14.896) 6.504,14.896 ; Y2.1@7.041,17.284 cw(c8.14,18.496) 6.504,18.496 ; C27.1@7.26,13.8 ccw(c6.439,13.8) 7.02,14.38 ccw(c7.6,14.961) C27.1@7.6,14.14 ; C27.1@7.6,13.8 6.504,14.896 ; 6.504,14.896 Y2.1@6.504,16.391 6.504,18.496
PA0: J1.45 U6.23 | length 5.3
  Top Layer w0.2: J1.45@3,19.6 cw(c3,18.634) 3.683,19.317 cw(c4.366,20) J1.45@3.4,20 ; J1.45@3,20 5,18 5,17.944 U6.23@5.622,17.322
PA1: J1.46 U6.24 | length 7.1
  Top Layer w0.2: J1.46@1,19.6 cw(c1,18.634) 1.683,19.317 cw(c2.366,20) J1.46@1.4,20 ; J1.46@1,20 2,19 3.397,19 4.6,17.797 4.6,17.637 U6.24@5.268,16.968
PA4: J1.39 U6.29 | length 5.8
  Top Layer w0.2: J1.39@3,13.6 cw(c3,12.634) 3.683,13.317 cw(c4.366,14) J1.39@3.4,14 ; J1.39@3,14 3.8,13.2 3.8,13.063 5.163,11.7 5.303,11.7 U6.29@5.975,12.372
PA5: J1.40 U6.30 | length 8.3
  Top Layer w0.2: J1.40@1,13.6 cw(c1,12.634) 1.683,13.317 cw(c2.366,14) J1.40@1.4,14 ; J1.40@1,14 2,13 3.297,13 4.897,11.4 4.997,11.3 5.61,11.3 U6.30@6.329,12.019
PA6: J1.37 U6.31 | length 5.4
  Top Layer w0.2: J1.37@3,12 3.731,12 ; J1.37@3.337,11.784 cw(c3.731,11.532) 3.731,12 ; J1.37@3.337,12.216 ccw(c3.731,12.468) 3.731,12 ; U6.31@6.682,11.665 5.918,10.9 4.831,10.9 3.731,12
PA7: J1.38 U6.32 | length 8.5
  Top Layer w0.2: J1.38@1,11.6 cw(c1,10.634) 1.683,11.317 cw(c2.366,12) J1.38@1.4,12 ; J1.38@1,12 1.8,11.2 3.866,11.2 4.566,10.5 6.225,10.5 U6.32@7.036,11.311
PA8: J1.43 U6.67 | length 24.2
  Top Layer w0.2: J1.43@2.998,17.8 cw(c2.995,17.395) 3.4,17.395 ; J1.43@3.172,17.639 cw(c3.259,17.459) 3.4,17.6 cw(c3.541,17.741) J1.43@3.361,17.828 ; 3.4,17.597 ccw(c2.997,17.597) J1.43@3,18 3.4,17.6 3.4,17.3 3.751,16.949 5.1,15.6 17.243,15.6 U6.67@22.239,10.604